# EAGLE board bouton (EAGLE 7.6.0)
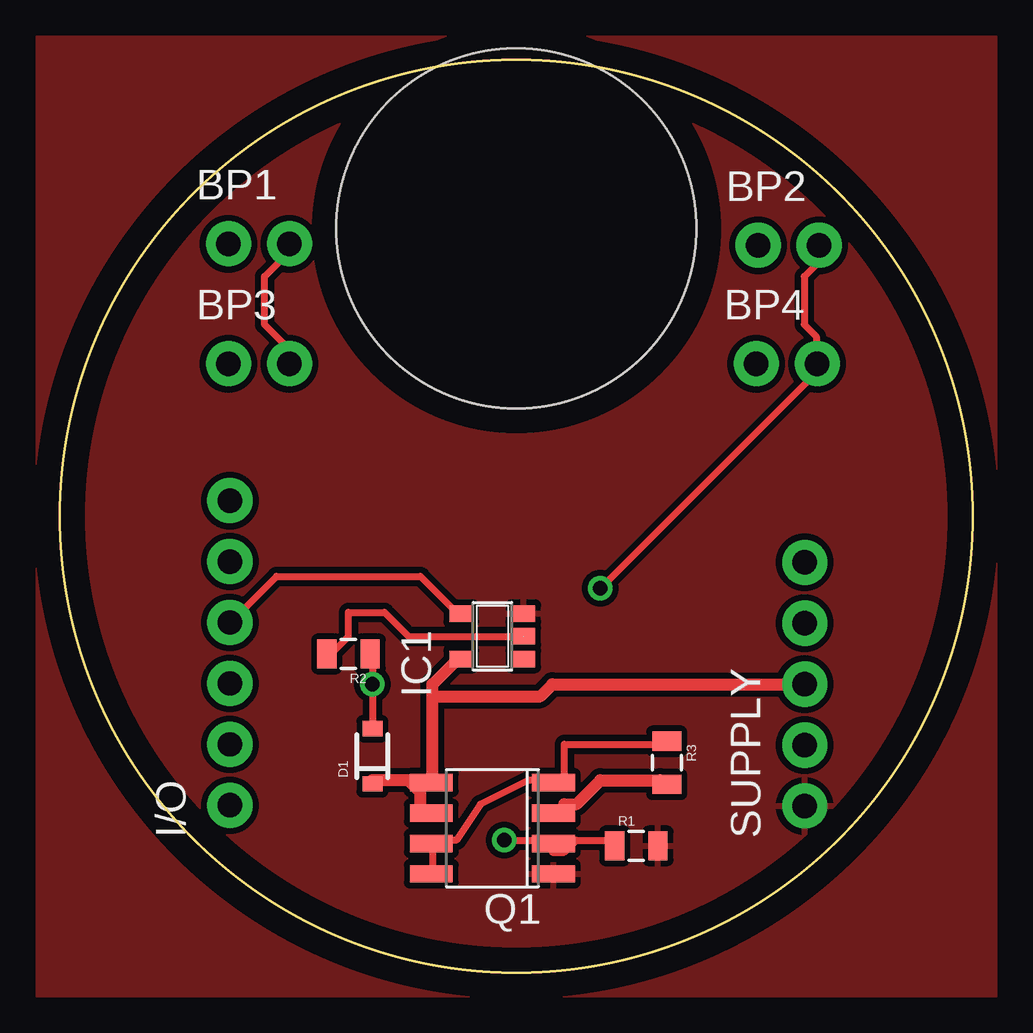
[diagram p0: board, top side]
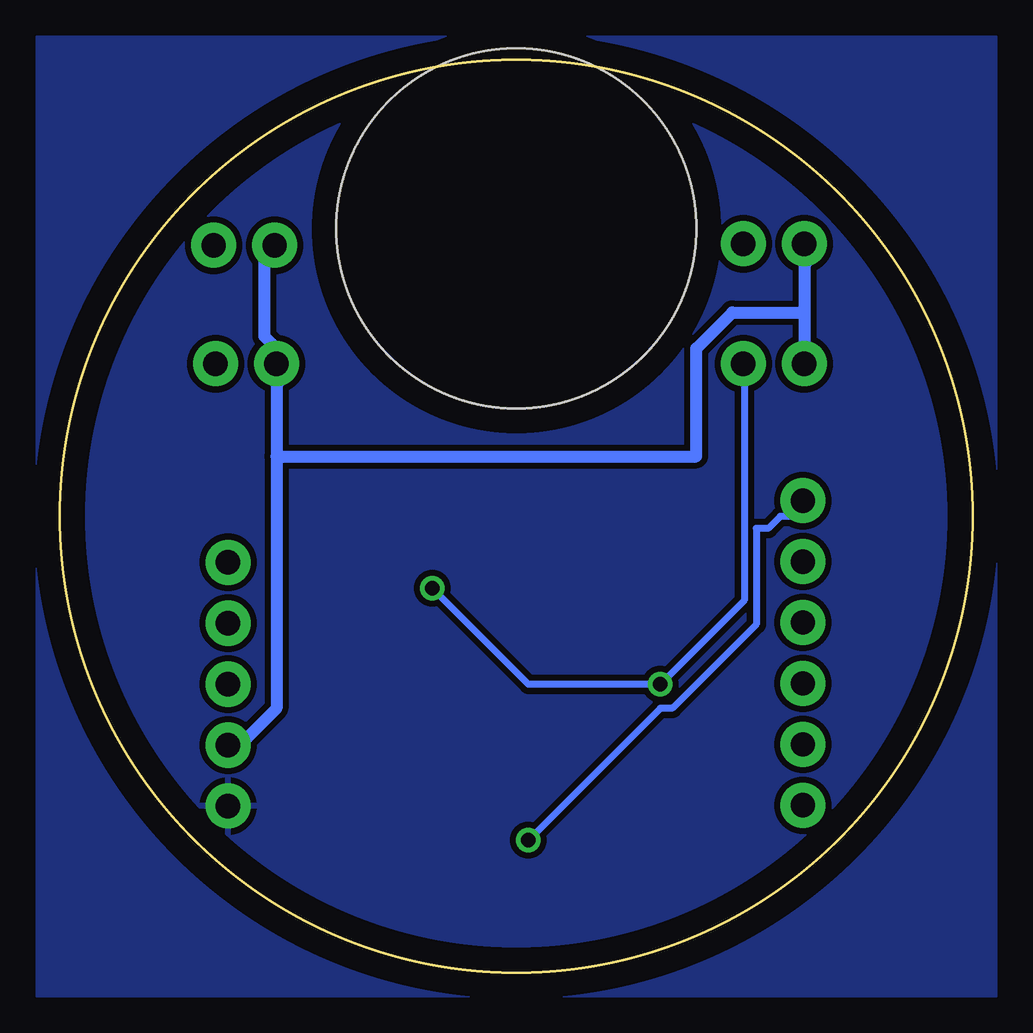
[diagram p1: board, bottom side, seen from below]

Size 38.05 x 38.05 mm. Coordinates in mm from the lower left corner, seen from the top.
Outline: circle at 19.03,19.03 radius 19.03
Copper layers (1*16): Top 0.035mm / dielectric 1.5mm / Bottom 0.035mm
Design rules "baballe": minimum track width 5mil, minimum drill 24mil, track to track 4mil, track to pad 4mil, pad to pad 4mil, via to via 4mil, smd to smd 2mil, copper to edge 40mil, drill to drill 8mil, minimum pad ring 10mil, minimum via ring 8mil, stop-mask expansion 4mil, vias tented up to drill 0mil, thermal gap 10mil
Net classes: 0 default: width 0.3 mm; 1 GND: width 0.5 mm, clearance 0.5 mm; 2 SUPPLY: width 0.5 mm, clearance 0.003 mm
Holes 15 mm at 19.03,31.03

## Footprints (pad centres in the part's own frame; a part is rotated, then mirrored left to right if it is on the bottom)
1X02_NO_SILK = drill 1.016 pad 1.88: 1 0,0; 2 2.54,0
SOD-323 = smd 0.63 x 0.83: A 1.15,0; C -1.15,0
1X06_NO_SILK = drill 1.016 pad 1.88: 1 0,0; 2 2.54,0; 3 5.08,0; 4 7.62,0; 5 10.16,0; 6 12.7,0
SOT23-5 = smd 0.69 x 0.99: 1 -0.95,-1.29; 2 0,-1.29; 3 0.95,-1.29; 4 0.95,1.3; 5 -0.95,1.3
SO08-IRF = smd 0.72 x 1.78: 1 -1.905,-2.543; 2 -0.635,-2.543; 3 0.635,-2.543; 4 1.905,-2.543; 5 1.905,2.543; 6 0.635,2.543; 7 -0.635,2.543; 8 -1.905,2.543
0805 = smd 0.8 x 1.2: 1 -0.9,0; 2 0.9,0
1X05_NO_SILK = drill 1.016 pad 1.88: 1 0,0; 2 2.54,0; 3 5.08,0; 4 7.62,0; 5 10.16,0

## Placement (x,y rotation side)
BP1  BP1  [1X02_NO_SILK]  7.03,30.39 0 top
BP2  BP2  [1X02_NO_SILK]  29.11,30.33 0 top
BP3  BP3  [1X02_NO_SILK]  7.03,25.39 0 top
BP4  BP4  [1X02_NO_SILK]  29.03,25.39 0 top
D1  250mA/100V  [SOD-323]  13.03,9.03 90 top
I/O  I/O  [1X06_NO_SILK]  7.08,6.98 90 top
IC1  74AHC1G04DBV  [SOT23-5]  18.03,14.03 90 top
Q1  IRF7319  [SO08-IRF]  18.03,6.03 90 top
R1  10KOhm  [0805]  24.03,5.3 0 top
R2  10KOhm  [0805]  12.03,13.3 180 top
R3  10KOhm  [0805]  25.3,8.76 270 top
SUPPLY  SUPPLY  [1X05_NO_SILK]  31.05,6.95 90 top

## Library data of the parts
BP1-BP4 SUPPLY = SparkFun-Connectors
D1 = SparkFun-DiscreteSemi; PROD_ID: DIO-09646
I/O = SparkFun-Connectors; PROD_ID: CONN-08437
IC1 = 74xx-little-de
Q1 = lio
R1-R3 = SparkFun-Resistors

## Nets
GND: IC1.3 Q1.1 R1.2 SUPPLY.1
I_BUTTON: I/O.4 IC1.4
N$1: Q1.4 Q1.7 Q1.8 R3.1
N$2: IC1.2 R2.2
O_POWER_CTRL: I/O.6 Q1.2 R1.1
V_ALIM [SUPPLY]: D1.C IC1.5 Q1.5 Q1.6 SUPPLY.3
V_BAT [SUPPLY]: Q1.3 R3.2
V_IN [SUPPLY]: BP1.1 BP2.1 BP3.1 BP4.1 SUPPLY.2
VS: BP1.2 BP2.2 BP3.2 BP4.2 D1.A R2.1

## Tracks (layer width: path | path; a pad name or v marks a point on that pad's centre or on a via)
GND
  pour Top (isolate 0.254): -0.97,39.03 39.03,39.03 39.03,-0.97 -0.97,-0.97
  pour Bottom (isolate 0.254): -0.97,39.03 39.03,39.03 39.03,-0.97 -0.97,-0.97
I_BUTTON
  Top 0.3: IC1.4 16.53,15.03 15.03,16.53 9.03,16.53 7.53,15.03 I/O.4
N$1
  Top 0.3: 15.53,5.53 15.53,4.03 Q1.8 | R3.1 25.03,9.53 21.03,9.53 21.03,8.03 Q1.4 20.53,8.03 19.53,8.03 17.53,7.03 16.53,5.53 15.53,5.53 | 15.53,5.53 Q1.7
N$2
  Top 0.3: IC1.2 14.53,14.03 13.53,15.03 12.03,15.03 12.03,14.03 11.03,13.03 R2.2
O_POWER_CTRL  (via drill 0.61)
  Top 0.3: 20.53,5.53 20.53,5.03 21.03,5.03 21.53,5.53 23.03,5.53 R1.1 | v18.53,5.53 20.53,5.53 | 20.53,5.53 Q1.2
  Bottom 0.3: v18.53,5.53 13.03,11.03 12.53,11.03 9.03,14.53 9.03,18.53 8.53,18.53 8.03,19.03 7.53,19.03 7.03,19.53 I/O.6
V_ALIM
  Top 0.5: 14.53,8.03 13.03,8.03 D1.C | 14.53,8.03 15.03,7.53 15.03,6.53 Q1.6 | 15.53,11.53 15.53,8.03 Q1.5 15.03,8.03 14.53,8.03 | 15.53,11.53 15.53,12.03 16.53,13.03 IC1.5 | 15.53,11.53 20.03,11.53 20.53,12.03 31.03,12.03 SUPPLY.3
V_BAT
  Top 0.5: R3.2 25.03,8.03 22.53,8.03 21.53,7.03 21.03,7.03 21.03,6.53 Q1.3
V_IN
  Bottom 0.5: 7.03,27.53 7.03,29.53 6.53,30.03 6.53,30.53 7.03,30.53 BP1.1 | 7.03,27.53 BP3.1 | 29.03,21.53 29.03,24.53 28.53,25.03 28.53,25.53 | 29.03,21.53 29.03,11.03 30.53,9.53 31.03,9.53 SUPPLY.2 | 28.53,25.53 29.03,25.53 BP4.1 28.53,25.53 | 28.53,25.53 29.53,26.53 29.53,30.03 BP2.1 | 7.03,27.53 10.03,27.53 11.53,26.03 11.53,21.53 29.03,21.53
VS  (via drill 0.61)
  Top 0.3: BP2.2 31.53,30.03 31.53,29.53 31.03,29.03 31.03,27.03 31.53,26.53 31.53,25.53 BP4.2 31.53,25.03 v22.53,16.03 | 13.03,10.03 D1.A v13.03,12.03 13.03,13.03 R2.1 | BP1.2 9.53,30.03 8.53,29.03 8.53,27.03 9.53,26.03 9.53,25.53 BP3.2
  Bottom 0.3: BP3.2 9.53,25.53 9.03,25.53 9.03,25.03 9.53,24.53 9.53,15.53 v13.03,12.03 18.53,12.03 v22.53,16.03